# Altium PCB Plumo-2D.PcbDoc (part 2 of 2)
Units mil, origin at the board's own origin, x right, y up, seen from the top; angles counter-clockwise.
Board outline 2000 x 900 mil, 4 copper layers (Top Layer, Signal Layer 1, Signal Layer 2, Bottom Layer), stack 64.618 mil thick; 97 components, 64 nets, 298 pads, 130 vias.
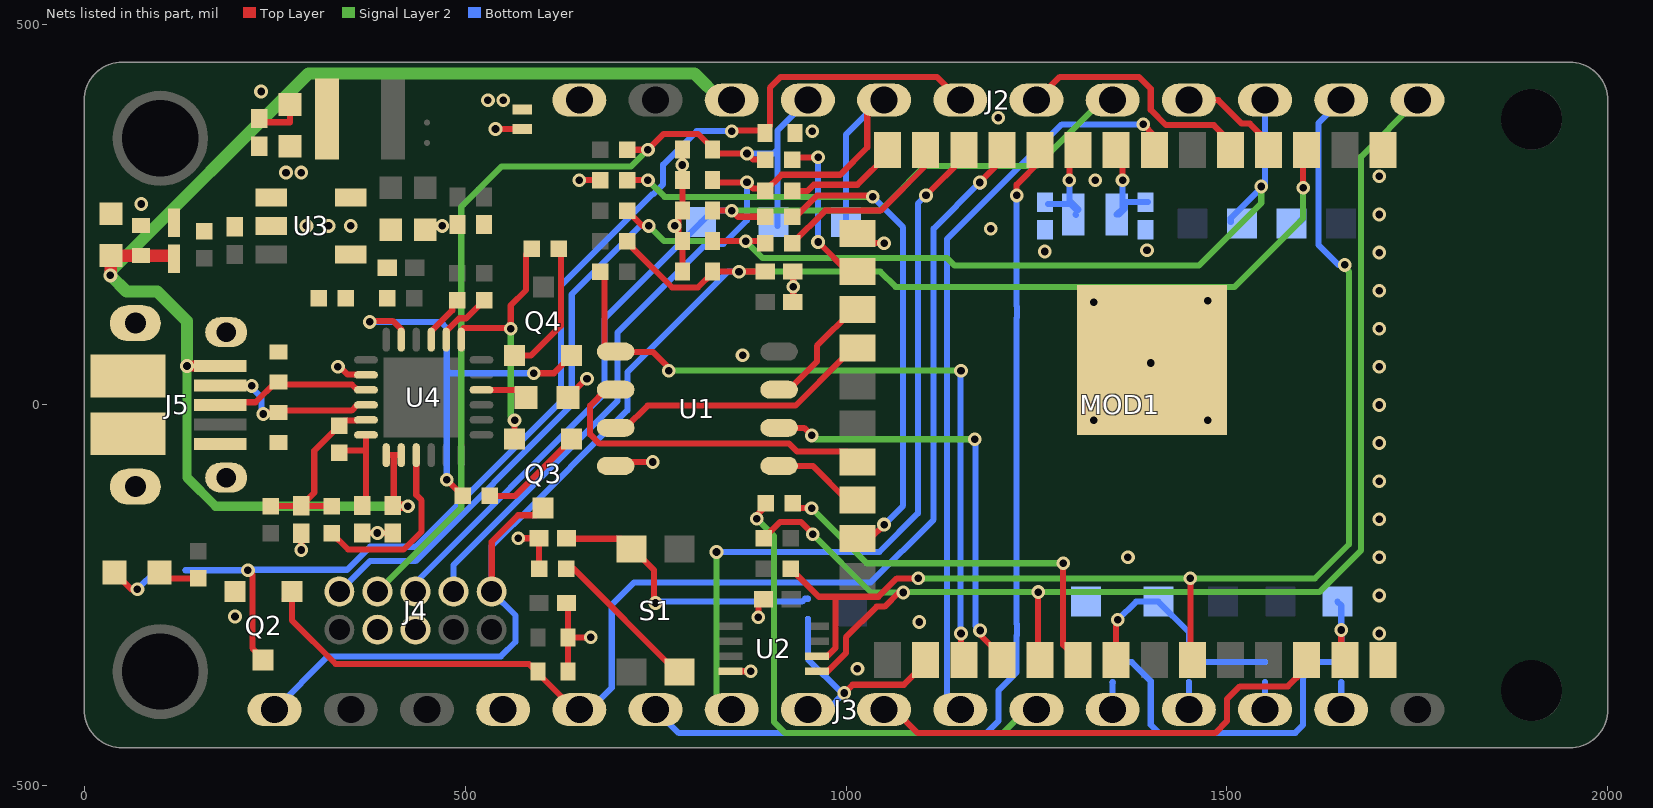
[diagram p4: the nets of this part, all layers, seen from the top]

## Via types
v1: diameter 18, hole 10, Top Layer to Bottom Layer, tented both sides, 130 vias

## Nets (pads, with @x,y where several pads share a name; then routed paths per layer and width w, separated by ;. In a path a pad name is that pad's centre, name@x,y a point inside that pad or via, vN(x,y) a via of type N, cw(c..) or ccw(c..) an arc to the next point about the centre after c; other vN are vias at no path point) (continued)
GND: C1.2 C2.2 C3.2 C4.2 C5.2 C6.2 C7.2 C9.2 C10.2 C11.2 C12.2 C13.2 C14.2 C15.2 C16.2 C17.2 C18.2 C19.2 C20.2 D1.2 D2.2 D3.2 D6.2 D7.2 D8.2 D9.2 D11.2 D12.2 D13.2 D14.2 D15.2 J3.13 J4.3 J4.5 J5.5 J5.6 J5.7 J5.8 J5.9 J5.10 J5.11 MOD1.1 MOD1.15 MOD1.38 MOD1.39 Q2.2 R11.2 R21.1 R22.2 TP1.1 U1.4 U2.4 U3.2 U4.2 | length 803.8
  Top Layer w8: C10.2@230,375.79 C10.2@235.81,369.98 ; C10.2@235.81,371 270.39,371 C9.2@270.39,394.57 ; v1(285,-190.39) C17.2@285,-168.5 ; v1(333.11,50) 335.82,50 346.09,39.72 369.65,39.72 U4.2@370,39.37 ; C20.2@365,-168.11 v1(385,-168.11) C16.2@405,-168.11 ; v1(540,362.21) D1.2@575,362.21 ; v1(570,-175) C15.2@596.89,-175 597.28,-175.39 R22.2@597.28,-215 ; D8.2@633.11,-348.11 635,-346.22 635,-306.89 633.11,-305 635,-303.11 635,-261.89 C5.2@633.11,-260 ; D2.2@635,-305 v1(665,-305) ; C19.2@635,10 659.37,34.37 v1(660,34.37) ; v1(650,295) R11.2@677.28,295 ; U1.4@697.72,-80 702.91,-74.8 v1(746.5,-74.8) ; D12.2@785.2,175 D3.2@785.2,215 780,220.2 780,249.8 D13.2@785.2,255 D14.2@785.2,295 v1(785.2,315) D11.2@785.2,335 ; U2.4@848.31,-349.53 v1(875,-349.53) ; v1(885,-278.83) 885,-261.89 C3.2@891.89,-255 ; C13.2@930.79,135 v1(930.79,155) C14.2@930.79,175 ; MOD1.15@1015.27,225 1027.92,212.35 v1(1050,212.35)
  other v1: 1015,-346.22 1700,-300 1096.19,-284.9 198.12,-277.73 1700,-250 1370,-200 1700,-200 1700,-150 1700,-100 1700,-50 1325,-20 1475,-20 1700,0 1700,50 1400,55 864.24,65.2 1700,100 1325,135 1475,137 1700,150 1700,200 1261,201.33 1395,203.19 1190,231.2 291.79,235 320.74,235 350,235 470,235 775,235 1700,250 75,263.77 1327,295 1700,300 955.75,359.42 1200,376.98 232.29,411.35
HOST_INT_N: J3.8 MOD1.36 | length 620.3
  Top Layer w8: J3.8@1050,-400 1063.78,-400 1094.43,-430.65 1484.35,-430.65 1500,-415 1500,-386.25 1516.9,-369.35 1579.94,-369.35 1600,-349.28 MOD1.36@1595,-344.28
IO0: D8.1 J3.12 MOD1.11 Q2.1 | length 1644.9
  Top Layer w8: Q2.1@263.22,-254.78 Q2.1@273,-245 273,-283 330,-340 583.66,-340 J3.12@643.66,-400 ; J3.12@636.22,-400 J3.12@643.66,-400 ; J3.12@650,-400 J3.12@643.66,-400 ; v1(1175.77,292) 1204.64,320.87 MOD1.11@1204.64,334.65
  Bottom Layer w8: J3.12@650,-400 663.78,-400 692.57,-371.21 692.57,-262.26 721.83,-233 1032.39,-233 1115,-150.39 1115,231.23 v1(1175.77,292) v1@1175.77,286.23
IO0_OD_N: D15.1 J2.6 Q2.3 SB2.1 | length 1552.1
  Top Layer w8: v1(215,-216.91) 220.78,-222.69 220.78,-319.23 235,-333.45 Q2.3@235,-335 ; v1@855,360 893.58,360 900,366.42 900,416.26 914.39,430.65 1119.35,430.65 J2.6@1150,400
  Bottom Layer w8: SB2.1@133.3,-216.91 v1(215,-216.91) 215.59,-216.31 345.3,-216.31 375.51,-186.11 435.51,-186.11 625.78,4.16 625.78,156.24 746.54,277 747.46,277 760,289.54 760,315.26 804.16,359.42 v1(850,359.42)
IO1: J3.11 MOD1.10 | length 1241.9
  Top Layer w8: v1(1224,275) 1224,289 1254.64,319.64 MOD1.10@1254.64,334.65
  Bottom Layer w8: J3.11@750,-400 780.65,-430.65 1184.35,-430.65 1200,-415 1200,-374.91 1224,-350.91 1224,-302.71 1224.26,-302.46 1224.26,-287.54 1224,-287.29 1224,114.29 1224.26,114.54 1224.26,129.46 1224,129.71 v1(1224,275)
IO2: J3.10 MOD1.12 | length 1002.6
  Top Layer w8: v1(1105,275) 1154.64,324.64 MOD1.12@1154.64,334.65
  Signal Layer 2 w8: v1(830,-193) 830,-380 J3.10@850,-400
  Bottom Layer w8: v1(830,-193) 1043.75,-193 1094.43,-142.32 1094.43,264.43 v1(1105,275)
IO3: J3.9 MOD1.26 SB1.1 | length 303
  Top Layer w8: v1(997.87,-378) 1008.61,-367.27 1076.08,-367.27 1104.64,-338.71 MOD1.26@1104.64,-334.65
  Bottom Layer w8: J3.9@950,-400 975.87,-400 v1(997.87,-378) 994.44,-378 950,-333.56 SB1.1@950,-280.94
MTCK: D11.1 J2.4 J4.4 R10.2 R19.1 TP6.1 | length 1281.7
  Top Layer w8: R10.2@712.72,335 v1(740,335) 760.81,355.81 805.72,355.81 831.46,330.07 v1(870,330.07) 878.07,322 R19.1@894.28,322 ; J2.4@929.46,383.69 945.77,400 J2.4@950,400
  Signal Layer 2 w8: J4.4@385,-245 495,-135 495,260 548,313 718,313 v1(740,335)
  Bottom Layer w8: v1(870,330.07) 905.07,330.07 910,335 ; TP6.1@910,235 910,335 ; J2.4@950,400 910,360 910,335
MTCK_M: MOD1.16 R19.2 | length 202.5
  Top Layer w8: R19.2@940,325 v1(963.33,325) ; v1(963.33,213.9) 1002.23,175 MOD1.16@1015.27,175
  Bottom Layer w8: v1(963.33,213.9) v1(963.33,325)
MTDI: D14.1 J2.5 J4.8 R18.1 TP14.1 | length 1196.8
  Top Layer w8: D14.1@824.57,295 827.42,292.15 v1(870,292.15) 878.15,284 R18.1@894.28,284 ; R18.1@894.28,281 915.46,302.17 992.17,302.17 1027.92,337.92 1027.92,382.15 1045.77,400 J2.5@1050,400
  Bottom Layer w8: J4.8@485,-245 485,-210 700,5 700,95 816.31,211.31 839.23,211.31 870,242.09 v1@870,290 ; TP14.1@999.75,240 999.75,354.75 1045,400 J2.5@1050,400
MTDI_M: MOD1.14 R18.2 | length 150.6
  Top Layer w8: R18.2@929.72,281 949.62,281 957.62,289 1014.9,289 1054.64,328.74 MOD1.14@1054.64,334.65
MTDO: D13.1 J2.8 J4.6 R20.1 TP13.1 | length 1320
  Top Layer w8: D13.1@824.57,255 v1(850,255) 858,247 R20.1@894.28,247
  Signal Layer 2 w8: v1(850,255) 1045.09,255 1082,291.91 1082,292.46 1102.91,313.36 1249.58,313.36 1336.22,400 J2.8@1350,400
  Bottom Layer w8: J4.6@435,-245 435,-233.03 683,14.97 683,113 TP13.1@810,240 825,255 v1(850,255)
MTDO_M: MOD1.23 R11.1 R20.2 | length 953.8
  Top Layer w8: R11.1@712.72,295 v1(740,295) ; R20.2@929.72,247 934,247 962.14,275.14 v1@1036.21,275.14 ; MOD1.23@1015.27,-175 1032,-175 v1(1050,-157) ; v1(1035.04,273.11) 1035.04,273.97 v1@1036.21,275.14 ; v1@1037.99,276.92 v1@1036.21,275.14
  Signal Layer 2 w8: v1(740,295) 761.89,273.11 v1(1035.04,273.11)
  Bottom Layer w8: v1(1035.04,273.11) 1075,233.15 1075,-132 v1(1050,-157)
MTMS: D3.1 J2.10 J4.2 R9.2 R17.1 TP5.1 | length 1857.5
  Top Layer w8: R9.2@712.72,255 732.72,235 v1(741.22,235) ; D3.1@824.57,215 v1(868.37,215) R17.1@894.57,215
  Signal Layer 2 w8: v1(741.22,235) 761.22,215 v1(868.37,215) 890.37,193 1132.46,193 1142.46,183 1463,183 1545,265 v1(1545,286.78)
  Bottom Layer w8: J4.2@335,-245 375,-205 435,-205 640,0 640,145 730,235 v1(741.22,235) ; TP5.1@1505,240 1505,245 1545,285 v1(1545,286.78) 1546.78,286.78 1550,290 J2.10@1550,400
MTMS_M: MOD1.13 R17.2 | length 246.4
  Top Layer w8: R17.2@929.72,212 972.72,255 1045.72,255 1105,314.28 1100,319.28 1110,329.28 MOD1.13@1104.64,334.65
NetC2_1: C2.1 MOD1.9 X1.2 | length 133.1
  Top Layer w8: v1(1293.2,295) 1293.2,322.48 1305,334.28 MOD1.9@1304.64,334.65
  Bottom Layer w8: C2.1@1265,263.67 1294.65,263.67 1303.32,255 1305,256.68 1293.2,268.48 v1(1293.2,295) ; X1.2@1301.32,250 X1.2@1302,249.32
NetC4_1: C4.1 MOD1.8 X1.1 | length 139.9
  Top Layer w8: MOD1.8@1354.64,334.65 1363.01,326.27 v1(1363.01,295)
  Bottom Layer w8: X1.1@1355.41,250 1363.01,257.6 v1(1363.01,295) ; X1.1@1358.41,250 1366.01,257.6 1366.01,265 1367.12,266.11 C4.1@1393,266.11 C4.1@1396,266.11
NetC8_2: C8.2 R16.1 R21.2 U3.4
NetC15_1: C15.1 S1.1 SB1.2 | length 378.6
  Top Layer w8: C15.1@633.11,-175 633.69,-175.58 704.79,-175.58 S1.1@718.5,-189.29 720.47,-189.29 748.09,-216.91 748.09,-258.09 v1(750,-260)
  Bottom Layer w8: v1(750,-260) 751.89,-258.11 942.4,-258.11 946.17,-254.34 SB1.2@950,-254.34
NetC19_1: C19.1 U4.16 | length 62.4
  Top Layer w8: U4.16@521.57,19.68 570.32,19.68 C19.1@580,10
NetC20_1: C20.1 R23.2 U4.6 | length 130.7
  Top Layer w8: R23.2@335,-62.72 337.72,-60 370,-60 ; C20.1@365,-131.89 370,-126.89 370,-60 ; U4.6@370,-39.37 370,-60
NetD4_A: D4.A R27.1 | length 54.1
  Top Layer w8: D4.A@99.06,-220 106.77,-227.72 R27.1@150,-227.72
NetD4_K: D4.K SB2.2 | length 102.1
  Top Layer w8: D4.K@28.81,-231.19 D4.K@40,-220 62.05,-242.05 v1(70,-242.05)
  Bottom Layer w8: v1(70,-242.05) 95.14,-216.91 SB2.2@106.7,-216.91
NetJ3_2: J3.2 SB4.1 | length 36
  Bottom Layer w8: J3.2@1650,-400 SB4.1@1650,-364.01
NetJ3_3: J3.3 SB5.1 | length 36
  Bottom Layer w8: J3.3@1550,-400 SB5.1@1550,-364.01
NetJ3_4: J3.4 SB6.1 | length 36
  Bottom Layer w8: J3.4@1450,-400 SB6.1@1450,-364.01
NetJ3_5: J3.5 SB7.1 | length 36
  Bottom Layer w8: J3.5@1350,-400 SB7.1@1350,-364.01
NetL1_1: L1.1 U3.5
NetQ3_1: Q3.1 R28.2 | length 138.1
  Top Layer w8: R28.2@532.72,-119.31 565.69,-119.31 Q3.1@640,-45
NetQ3_2: Q3.2 R29.1 U4.19 | length 353.9
  Top Layer w8: U4.19@495.85,74.78 495,75.63 U4.19@495,85.63 495,97.76 498,100.76 559.24,100.76 v1(560,100) 560,130.65 580,150.65 580,197.72 R29.1@587.28,205 ; Q3.2@565,-45 565,-20.43 564.57,-20 v1(565,-20)
  Signal Layer 2 w8: v1(560,100) 560,-15 v1(565,-20)
NetQ4_1: Q4.1 R29.2 | length 181
  Top Layer w8: Q4.1@565,65 586.77,65 625.78,104.01 625.78,205 R29.2@622.72,205
NetQ4_2: Q4.2 R28.1 U4.23 | length 568.1
  Top Layer w8: v1(375,109) 376.38,110.38 405.04,110.38 416.26,99.16 U4.23@416.26,85.63 ; v1(476,-98.03) R28.1@497.28,-119.31 R28.1@495.87,-119.31 ; v1(590,41.6) 616.6,41.6 Q4.2@640,65
  Bottom Layer w8: v1@375,110 v1(375,109) 468,109 476,101 v1(476,-98.03) ; 478,43 479.4,41.6 v1(590,41.6)
NetR22_1: R22.1 S1.4 | length 205
  Top Layer w8: R22.1@632.72,-215 642.51,-215 778.22,-350.71 S1.4@781.5,-350.71
NetR25_2: R25.2 U4.21 | length 65.9
  Top Layer w8: U4.21@455.63,85.63 455.63,96.46 483.17,124 483.17,130.46 R25.2@490,137.28
NetR26_2: R26.2 U4.20 | length 77.4
  Top Layer w8: U4.20@475.32,85.63 475.32,96.46 492.61,113.76 501.47,113.76 R26.2@525,137.28
NetR31_1: R31.1 U4.9 | length 239.8
  Top Layer w8: R31.1@325,-168.11 346.6,-189.71 419.36,-189.71 443,-166.07 443,-125.2 435.94,-118.14 U4.9@435.94,-65.94
QPI_CK: MOD1.28 U1.6 | length 567.9
  Top Layer w8: U1.6@912.28,-30 945,-30 v1(955,-40) ; v1(1176,-296) 1176,-301.94 1204.64,-330.58 MOD1.28@1204.64,-334.65
  Signal Layer 2 w8: v1(955,-40) 960,-45 v1(1169,-45) v1@1170,-45
  Bottom Layer w8: v1@1170,-45 1170,-290 v1(1176,-296)
QPI_CS: MOD1.27 R13.2 U1.1 | length 954.6
  Top Layer w8: R13.2@677.28,175 683.1,169.18 683.1,77.22 690.32,70 U1.1@697.72,70 698.03,69.68 746.5,69.68 767.28,48.9 v1(767.28,45) ; v1(1151,-300) 1151,-331.01 MOD1.27@1154.64,-334.65
  Signal Layer 2 w8: v1(767.28,45) v1@1145,45
  Bottom Layer w8: v1@1150.36,39.64 1150.36,-297.36 v1@1153,-300
  other v1: 1151,45
QPI_DI: MOD1.22 U1.5 | length 121.6
  Top Layer w8: U1.5@912.28,-80 956.33,-80 1001.33,-125 MOD1.22@1015.27,-125
QPI_DO: MOD1.21 U1.2 | length 446.3
  Top Layer w8: U1.2@697.72,20 684.92,20 664.11,-0.81 664.11,-38.62 676.3,-50.81 925.32,-50.81 935.79,-61.28 1001.55,-61.28 MOD1.21@1015.27,-75
QPI_HD: MOD1.17 U1.7 | length 158.6
  Top Layer w8: U1.7@912.28,20 925.08,20 961.86,56.78 961.86,77.49 1009.36,125 MOD1.17@1015.27,125
QPI_WP: MOD1.18 U1.3 | length 361.1
  Top Layer w8: U1.3@697.72,-30 710.51,-30 739.7,-0.81 933.7,-0.81 995.65,61.14 995.65,61.28 1009.36,75 MOD1.18@1015.27,75
RESET_N: C14.1 D12.1 J3.16 J4.10 MOD1.3 Q3.3 R12.1 TP7.1 | length 2302.4
  Top Layer w8: J3.16@250,-400 J3.16@263.78,-400 ; J4.10@535,-245 535,-179.54 569.76,-144.78 592.22,-144.78 Q3.3@602,-135 ; R12.1@712.72,215 719.54,208.17 719.54,206.27 771.63,154.19 805.72,154.19 824.57,173.03 D12.1@824.57,175 v1(859.57,175) C14.1@893.89,175 C14.1@894.57,175 ; v1(1600,285) 1600,330.01 MOD1.3@1604.64,334.65
  Signal Layer 2 w8: v1(859.57,175) 1045,175 1065,155 1510,155 1600,245 v1(1600,285)
  Bottom Layer w8: J3.16@250,-400 320,-330 547,-330 566.19,-310.81 566.19,-276.19 J4.10@535,-245 535,-184.54 562.54,-157 563,-157 713,-7 713,43 845,175 v1(859.57,175) ; TP7.1@1595,240 1600,245 v1(1600,285)
SCL: J2.11 MOD1.33 R8.2 U2.6 | length 1598.1
  Top Layer w8: R8.2@927.72,-215 964.46,-251.74 985,-251.74 ; U2.6@961.69,-329.84 975.41,-329.84 986.44,-318.81 986.44,-253.18 985,-251.74 ; v1(1095,-227.59) 1066.75,-227.59 1042.6,-251.74 985,-251.74 ; v1(1452,-227.6) 1452,-332.01 MOD1.33@1454.64,-334.65
  Signal Layer 2 w8: v1(1095,-227.59) v1(1452,-227.6) 1615.57,-227.6 1660,-183.17 1660,175 1654.56,180.44 v1(1654.56,183.77)
  Bottom Layer w8: J2.11@1650,400 1620,370 1620,210 1646.23,183.77 v1(1654.56,183.77)
SDA: J2.12 MOD1.29 R7.2 U2.5 | length 1735.2
  Top Layer w8: R7.2@892.28,-175 913.74,-153.54 940.64,-153.54 956.44,-169.34 v1(956.44,-169.78) ; U2.5@960.77,-348.61 U2.5@961.69,-349.53 976.02,-349.53 999.75,-325.8 999.75,-305.15 1040.16,-264.74 1050.57,-264.74 1069.17,-246.14 v1(1075,-246.14) ; v1(1252.15,-245.59) 1252.15,-332.16 MOD1.29@1254.64,-334.65
  Signal Layer 2 w8: v1(956.44,-169.78) 1032.8,-246.14 v1(1075,-246.14) 1075.54,-245.6 1089.46,-245.6 v1(1252.15,-245.59) 1444.53,-245.59 1621.23,-245.6 1676,-190.83 1676,326 J2.12@1750,400
SHIELD1: J2.9 MOD1.4 | length 137.6
  Top Layer w8: J2.9@1450,400 1488.75,400 1519.4,369.35 1530,369.35 1554.64,344.71 MOD1.4@1554.64,334.65
SHIELD2: J2.7 MOD1.5 | length 343.4
  Top Layer w8: J2.7@1263.78,400 J2.7@1250,400 1280.65,430.65 1384.35,430.65 1400,415 1400,387.28 1420.02,367.27 1482.73,367.27 1504.64,345.36 MOD1.5@1504.64,334.65
SPI_CS: J3.7 MOD1.7 | length 984.5
  Top Layer w8: v1(1390,368.32) 1404.64,353.68 MOD1.7@1404.64,334.65
  Bottom Layer w8: J3.7@1150,-400 1132.46,-382.46 1132.46,217.46 1283.32,368.32 v1(1390,368.32)
SPI_MISO: MOD1.31 SB5.2 SB6.2 TP10.1 | length 314.8
  Top Layer w8: MOD1.31@1354.64,-339.64 MOD1.31@1354.64,-334.65 v1@1354.64,-284.03
  Bottom Layer w8: v1(1356.78,-282.03) 1380.81,-258 TP10.1@1410,-258 1450,-298 SB6.2@1450,-337.41 SB5.2@1550,-337.41
SPI_MOSI: MOD1.37 SB4.2 SB7.2 TP11.1 | length 570.7
  Top Layer w8: v1(1650,-295.36) 1650,-330.01 MOD1.37@1654.64,-334.65
  Bottom Layer w8: SB7.2@1350,-337.41 1375,-337.41 1400,-362.41 1400,-419.8 1410.86,-430.65 1590.2,-430.65 1590.2,-429.8 1600,-420 1600,-357.41 1620,-337.41 SB4.2@1650,-337.41 v1(1650,-295.36) 1650,-263 TP11.1@1645,-258
SPI_SCLK: MOD1.30 R6.2 | length 522.2
  Top Layer w8: R6.2@927.72,-135.46 v1(954.8,-135.46) ; v1(1285,-207.85) 1285,-315.01 MOD1.30@1304.64,-334.65
  Signal Layer 2 w8: v1(954.8,-135.46) 1027.16,-207.82 v1@1285,-207.82
SPI_SCLK_R: J3.6 R6.1 | length 657.3
  Top Layer w8: v1(882.74,-149.51) 882.74,-145 R6.1@892.28,-135.46
  Signal Layer 2 w8: v1(882.74,-149.51) 905.57,-172.34 905.57,-416.22 920,-430.65 1205.57,-430.65 1236.22,-400 J3.6@1250,-400
USB_N: D7.1 J5.2 U4.4 | length 224.7
  Top Layer w8: D7.1@255,-10 257.54,-7.46 351.22,-7.46 358.67,0 U4.4@370,0
  Top Layer w10: J5.2@178.5,25.59 178.79,25.3 219.7,25.3 v1(220,25) ; v1(235,-11.81) 235.91,-10.91 254.09,-10.91 D7.1@255,-10
  Bottom Layer w8: v1(220,25) 220,22.29 233.11,9.19 233.11,-9.92 v1(235,-11.81)
USB_P: D6.1 J5.3 U4.3 | length 208.2
  Top Layer w8: J5.3@178.5,0 182.09,3.59 224.94,3.59 251.36,30 D6.1@255,30 258.28,26.72 351.64,26.72 358.67,19.68 U4.3@370,19.68
VIN: C9.1 C10.1 D1.1 D10.1 J2.1 R15.1 U3.1
  other v1: 265,305 285,305 530,400 550,400
VIO: C17.1 R23.1 R24.2 R31.2 U4.5 | length 244.2
  Top Layer w8: R24.2@245,-132.68 284.61,-132.68 C17.1@285,-132.28 ; R31.2@325,-132.68 285.39,-132.68 C17.1@285,-132.28 ; U4.5@370,-19.69 358.67,-19.69 357.83,-20.53 341.75,-20.53 R23.1@335,-27.28 302.11,-60.17 302.11,-115.17 C17.1@285,-132.28
VUSB: C16.1 C18.1 D9.1 D10.2 J2.3 J5.1 U4.7 U4.8 | length 1834.6
  Top Layer w8: U4.7@396.57,-65.94 406.42,-65.94 ; C16.1@405.98,-132.87 406.42,-132.44 406.42,-65.94 ; U4.8@416.26,-65.94 406.42,-65.94
  Top Layer w10: C18.1@35.27,205 C18.1@42.55,197.72
  Top Layer w12: C18.1@34.91,204.65 C18.1@35.27,205 ; C16.1@405.98,-132.87 v1(425,-132.87)
  Top Layer w14: v1(135,51.18) J5.1@178.5,51.18
  Top Layer w16: v1@34.91,172.35 C18.1@34.91,201.65 ; C18.1@42.55,195.72 110,195.72
  Signal Layer 2 w12: v1(135,51.18) 135,-95.17 172.7,-132.87 v1(425,-132.87) ; J2.3@836.22,400 J2.3@850,400
  Signal Layer 2 w16: v1(34.56,170) v1@34.56,175 ; v1@34.91,169.65 55.56,149 96,149 135,110 v1(135,51.18) ; v1@34.91,175.35 294.56,435 801.22,435 J2.3@836.22,400
pads on no net: H1.H H2.H H3.H H4.H J3.1 J3.14 J4.7 J4.9 J5.4 MOD1.19 MOD1.20 MOD1.24 MOD1.32 S1.2 S1.3 U2.1 U2.2 U2.3 U2.7 U4.1 U4.10 U4.11 U4.12 U4.13 U4.14 U4.15 U4.17 U4.18 U4.22 U4.24 U4.25

## Polygon pours and split planes (outlines as drawn)
GND on Bottom Layer "GND_L04_P002" (solid, remove dead copper, pour order 2): 1750,450 1750,-450 0,-450 0,450
GND on Signal Layer 1 "GND_L02_P004" (solid, remove dead copper, pour order 4): 0,450 0,-450 1270,-450 1330,-450 1390,-450 1750,-450 1750,450
GND on Top Layer "GND_L01_P000" (solid, remove dead copper, pour order 0): 1750,450 1750,-450 0,-450 0,450

## Keep-outs
Keep-Out Layer:
  the board outline again, w0.5

## Other copper
Top Layer:
  rectangle net GND: 228.07,398.3 256.56,409.5
  region net NetL1_1: 375,430 375,260 300,260 300,430
  region net 3V3_O: 380,430 380,260 425,260 425,360 470,360 470,394.57 425,394.57 425,430
  region net GND: 185,255 540,255 540,210 470,210 385,210 375,220 185,220
  region net VIN: 185,260 185,285 220,285 220,315 220,355 295,355 295,260
  region net 3V3: 430,355 430,260 560,260 560,290 475,290 470,295 470,355
  region net NetC8_2: 325,215 370,215 380,205 415,205 415,125 325,125
  region net VIN: 185,285 110,257.83 110,226.81 140,226.81 140,215 180,215 180,260 185,260
  region net 3V3_O: 420,205 420,125 470,125 470,205
  region net VIN: 670,380 670,420 500,420 500,380
Signal Layer 2:
  region net VIN: 255,295 255,320 295,320 295,295
  region net 3V3_O: 425,320 385,320 385,300 385,210 450,145 470,145 470,185 425,230
  region net VIN: 255,295 255,335 340,420 560,420 560,380 350,380 295,325 295,295
Bottom Layer:
  region net GND: 280,245 280,225 360,225 360,245

## Silkscreen, mask and mechanical layers (free items; w line width, h text height)
Bottom Overlay:
  drawing of 1384 lines, arcs and shapes, not listed
  text "SHD2" at 1290.79,330.88 h40
  text "MTDO" at 1405,330 h40
  text "EN" at 740,311 h40 r270
  text "VIN" at 640,298 h40 r270
  text "SCL" at 1640,288 h40 r270
  text "SDA" at 1725,284 h40 r270
  text "MTDI" at 1040,275 h40 r270
  text "SHD1" at 1439.51,266.11 h40 r270
  text "VUSB" at 837,260 h40 r270
  text "MTMS" at 1541,260 h38 r270
  text "MTCK" at 940,258 h40 r270
  text "Plumo-2D" at 508.56,250 h78.74
  text "IO0_OD_N" at 1140,190 h40 r270
  text "PVT" at 508.56,180 h78.74
  text "3V3" at 1640,145 h40 r270
  text "MTDI" at 988,120 h40 r270
  text "MTDO" at 795,109 h40 r270
  text "MTCK" at 894,107.28 h40 r270
  text "RST_N" at 1573.13,95.84 h40 r270
  text "MTMS/D-RTS" at 1510,-10 h40 r270
  text "FACT_MODE_N" at 1445,-50 h40 r270
  text "GND" at 1305,-227 h40 r270
  text "D-RX" at 1482.63,-228.92 h40 r270
  text "D-TX" at 1557.49,-228.59 h40 r270
  text "MISO/TX" at 1398,-230.21 h40 r270
  text "MOSI/RX" at 1633.95,-230.83 h40 r270
  text "BM_SEL" at 1000,-244 h40 r270
  text "MOSI" at 1340.86,-321 h40 r270
  text "MISO" at 1438.5,-321.64 h40 r270
  text "RX" at 1636.25,-324.52 h40 r270
  text "TX" at 1537.64,-325.73 h40 r270
  text "3V3_O" at 400,-353 h40
  text "3V3" at 485,-353 h40
  text "GND" at 590,-353 h40
  text "RST_N" at 240,-354 h40 r270
  text "IO0" at 638,-354 h40 r270
  text "IO1" at 740,-354 h40 r270
  text "IO2" at 840,-354 h40 r270
  text "IO3" at 940,-354 h40 r270
  text "H_INT" at 1040,-354 h40 r270
  text "CS" at 1140,-354 h40 r270
  text "SCLK" at 1240,-354 h40 r270
Mechanical 1:
  drawing of 295 lines, arcs and shapes, not listed
  text "Layer" at -9.42,3977 h60
  text "Name" at 400.49,3977 h60
  text "Material" at 1340.23,3977 h60
  text "Thickness" at 2200,3977 h60
  text "Constant" at 2849.84,3977 h60
  text "Board Layer Stack" at 3419.7,3977 h60
  text "1" at -9.42,3857 h60
  text "Top Overlay" at 400.49,3857 h60
  text "2" at -9.42,3737 h60
  text "Top Solder" at 400.49,3737 h60
  text "Solder Resist" at 1340.23,3737 h60
  text "0.40mil" at 2200,3737 h60
  text "3.5" at 2849.84,3737 h60
  text "3" at -9.42,3617 h60
  text "Top Layer" at 400.49,3617 h60
  text "Copper" at 1340.23,3617 h60
  text "1.40mil" at 2200,3617 h60
  text "4" at -9.42,3497 h60
  text "Dielectric 1" at 400.49,3497 h60
  text "FR408" at 1340.23,3497 h60
  text "6.70mil" at 2200,3497 h60
  text "4.2" at 2849.84,3497 h60
  text "5" at -9.42,3377 h60
  text "Signal Layer 1" at 400.49,3377 h60
  text "Copper" at 1340.23,3377 h60
  text "0.71mil" at 2200,3377 h60
  text "6" at -9.42,3257 h60
  text "Dielectric 3" at 400.49,3257 h60
  text "FR408" at 1340.23,3257 h60
  text "47.00mil" at 2200,3257 h60
  text "4.2" at 2849.84,3257 h60
  text "7" at -9.42,3137 h60
  text "Signal Layer 2" at 400.49,3137 h60
  text "Copper" at 1340.23,3137 h60
  text "0.71mil" at 2200,3137 h60
  text "8" at -9.42,3017 h60
  text "Dielectric 2" at 400.49,3017 h60
  text "FR408" at 1340.23,3017 h60
  text "6.70mil" at 2200,3017 h60
  text "4.2" at 2849.84,3017 h60
  text "9" at -9.42,2897 h60
  text "Bottom Layer" at 400.49,2897 h60
  text "Copper" at 1340.23,2897 h60
  text "1.40mil" at 2200,2897 h60
  text "10" at -9.42,2777 h60
  text "Bottom Solder" at 400.49,2777 h60
  text "Solder Resist" at 1340.23,2777 h60
  text "0.40mil" at 2200,2777 h60
  text "3.5" at 2849.84,2777 h60
  text "11" at -9.42,2657 h60
  text "Bottom Overlay" at 400.49,2657 h60
  text "Vias are to be filled. / Lead free ENIG finish." at -5,-750 h100
Drill Drawing:
  circle w10: c9.74,2067.33 r33.33
  lines w10: -23.59,1284 -23.59,1300.67 -6.93,1317.33 -23.59,1334 -23.59,1350.67 -6.93,1350.67 9.74,1334 26.41,1350.67 43.07,1350.67 43.07,1334 26.41,1317.33 43.07,1300.67 43.07,1284 26.41,1284 9.74,1300.67 -6.93,1284 -23.59,1284 ; -23.59,1434 43.07,1434 43.07,1500.67 -23.59,1500.67 -23.59,1434 ; -23.59,1617.33 9.74,1584 43.07,1617.33 9.74,1650.67 -23.59,1617.33 ; -23.59,1734 9.74,1750.67 43.07,1734 26.41,1767.33 43.07,1800.67 9.74,1784 -23.59,1800.67 -6.93,1767.33 -23.59,1734 ; -23.59,1900.67 -6.93,1900.67 -6.93,1884 26.41,1884 26.41,1900.67 43.07,1900.67 43.07,1934 26.41,1934 26.41,1950.67 -6.93,1950.67 -6.93,1934 -23.59,1934 -23.59,1900.67 ; -23.59,2250.67 43.07,2250.67 9.74,2184 -23.59,2250.67
  lines w15: -83.38,1239 11037.5,1239 ; -83.38,2289 11037.5,2289 ; 467.49,1089 467.49,2439 ; 1057.34,1089 1057.34,2439 ; 2207,1089 2207,2439 ; 2712.88,1089 2712.88,2439 ; 3446.68,1089 3446.68,2439 ; 4946.23,1089 4946.23,2439 ; 5536.08,1089 5536.08,2439 ; 6281.88,1089 6281.88,2439 ; 7471.53,1089 7471.53,2439 ; 8325.29,1089 8325.29,2439 ; 9658.9,1089 9658.9,2439 ; -83.38,1089 11037.5,1089 11037.5,2439 -83.38,2439 -83.38,1089
  text "Symbol" at 6.62,2334 h72
  text "Count" at 512.49,2334 h72
  text "Hole Size" at 1102.34,2334 h72
  text "Plated" at 2252,2334 h72
  text "Hole Type" at 2757.88,2334 h72
  text "Drill Layer Pair" at 3491.68,2334 h72
  text "Via/Pad" at 4991.23,2334 h72
  text "Pad Shape" at 5581.08,2334 h72
  text "Template" at 6326.88,2334 h72
  text "Description" at 7516.53,2334 h72
  text "Hole Tolerance (+)" at 8370.29,2334 h72
  text "Hole Tolerance (-)" at 9703.9,2334 h72
  text "2" at 512.49,2184 h60
  text "25.59mil (0.650mm)" at 1102.34,2184 h60
  text "PTH" at 2252,2184 h60
  text "Slot" at 2757.88,2184 h60
  text "Top Layer - Bottom Layer" at 3491.68,2184 h60
  text "Pad" at 4991.23,2184 h60
  text "Rounded" at 5581.08,2184 h60
  text "r140_100h65_105r100" at 6326.88,2184 h60
  text "2" at 512.49,2034 h60
  text "27.56mil (0.700mm)" at 1102.34,2034 h60
  text "PTH" at 2252,2034 h60
  text "Slot" at 2757.88,2034 h60
  text "Top Layer - Bottom Layer" at 3491.68,2034 h60
  text "Pad" at 4991.23,2034 h60
  text "Rounded" at 5581.08,2034 h60
  text "r170_120h70_120r100" at 6326.88,2034 h60
  text "2" at 512.49,1884 h60
  text "80.00mil (2.032mm)" at 1102.34,1884 h60
  text "NPTH" at 2252,1884 h60
  text "Round" at 2757.88,1884 h60
  text "Top Layer - Bottom Layer" at 3491.68,1884 h60
  text "Pad" at 4991.23,1884 h60
  text "Rounded" at 5581.08,1884 h60
  text "c203hn203m103p303" at 6326.88,1884 h60
  text "2" at 512.49,1734 h60
  text "100.00mil (2.540mm)" at 1102.34,1734 h60
  text "PTH" at 2252,1734 h60
  text "Round" at 2757.88,1734 h60
  text "Top Layer - Bottom Layer" at 3491.68,1734 h60
  text "Pad" at 4991.23,1734 h60
  text "Rounded" at 5581.08,1734 h60
  text "c318h254p418" at 6326.88,1734 h60
  text "10" at 512.49,1584 h60
  text "27.56mil (0.700mm)" at 1102.34,1584 h60
  text "PTH" at 2252,1584 h60
  text "Round" at 2757.88,1584 h60
  text "Top Layer - Bottom Layer" at 3491.68,1584 h60
  text "Pad" at 4991.23,1584 h60
  text "Rounded" at 5581.08,1584 h60
  text "c100h70" at 6326.88,1584 h60
  text "28" at 512.49,1434 h60
  text "35.43mil (0.900mm)" at 1102.34,1434 h60
  text "PTH" at 2252,1434 h60
  text "Round" at 2757.88,1434 h60
  text "Top Layer - Bottom Layer" at 3491.68,1434 h60
  text "Pad" at 4991.23,1434 h60
  text "Rounded" at 5581.08,1434 h60
  text "r180_110h90r100" at 6326.88,1434 h60
  text "130" at 512.49,1284 h60
  text "10.00mil (0.254mm)" at 1102.34,1284 h60
  text "PTH" at 2252,1284 h60
  text "Round" at 2757.88,1284 h60
  text "Top Layer - Bottom Layer" at 3491.68,1284 h60
  text "Via" at 4991.23,1284 h60
  text "Rounded" at 5581.08,1284 h60
  text "v46h25m0mx0" at 6326.88,1284 h60
  text "176 Total" at 512.49,1134 h60
  text "Slot definitions :" at 6.62,989.03 h60
  text "Routed Path Length" at 1039.31,989.03 h60
  text "= Calculated from tool start centre position to tool end centre position." at 2141.97,989.03 h60
  text "Hole Length" at 1039.31,889.05 h60
  text "= Routed Path Length + Tool Size = Slot length as defined in the PCB layout" at 1732.1,889.05 h60

## Dimensions
50,450 to 50,-450 on Mechanical 1
0,400 to 2000,400 on Mechanical 1

## Text inside footprints (layer, text, board x,y; h text height)
J5: Mechanical 1 "PCB Edge" at 7.83,-165.35 h19.68 r270
MOD1: Mechanical 5 "Antenna Keepout" at 2639.95,430 h60 r270